# EAGLE board PCB layout - Eagle (EAGLE 7.5.0)
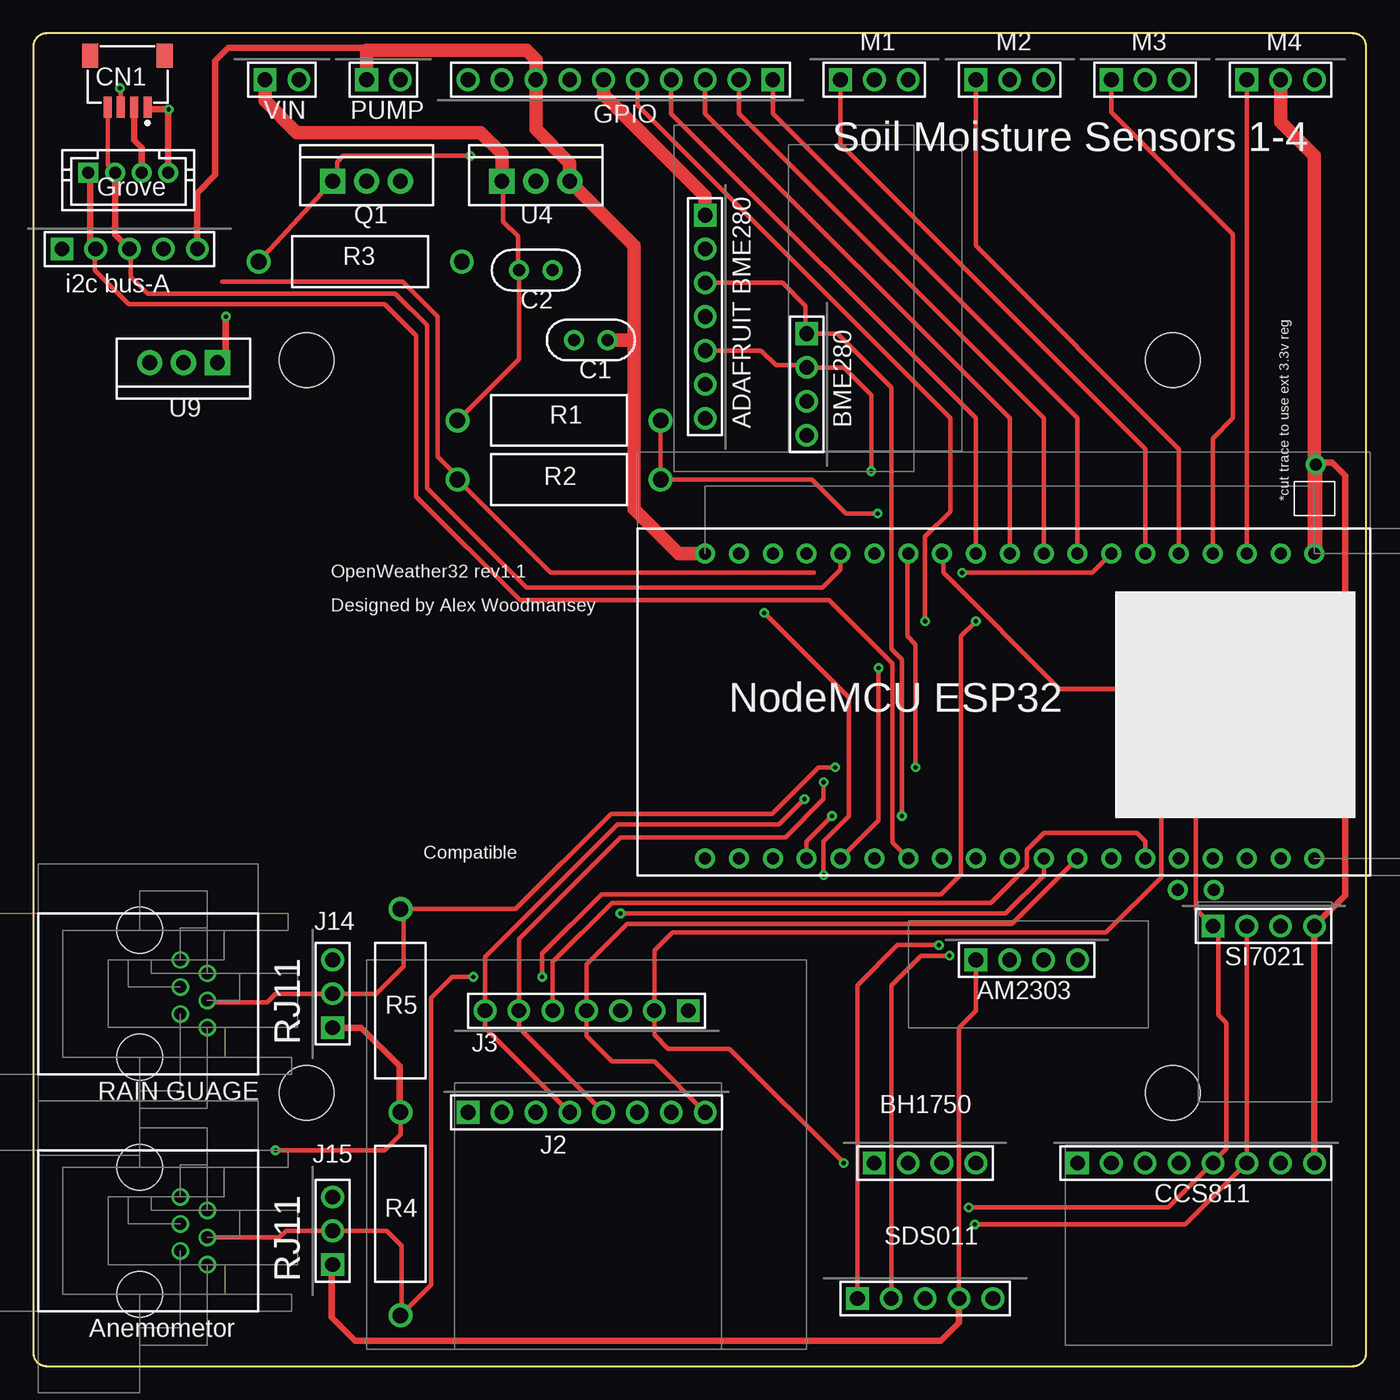
[diagram p0: board, top side]
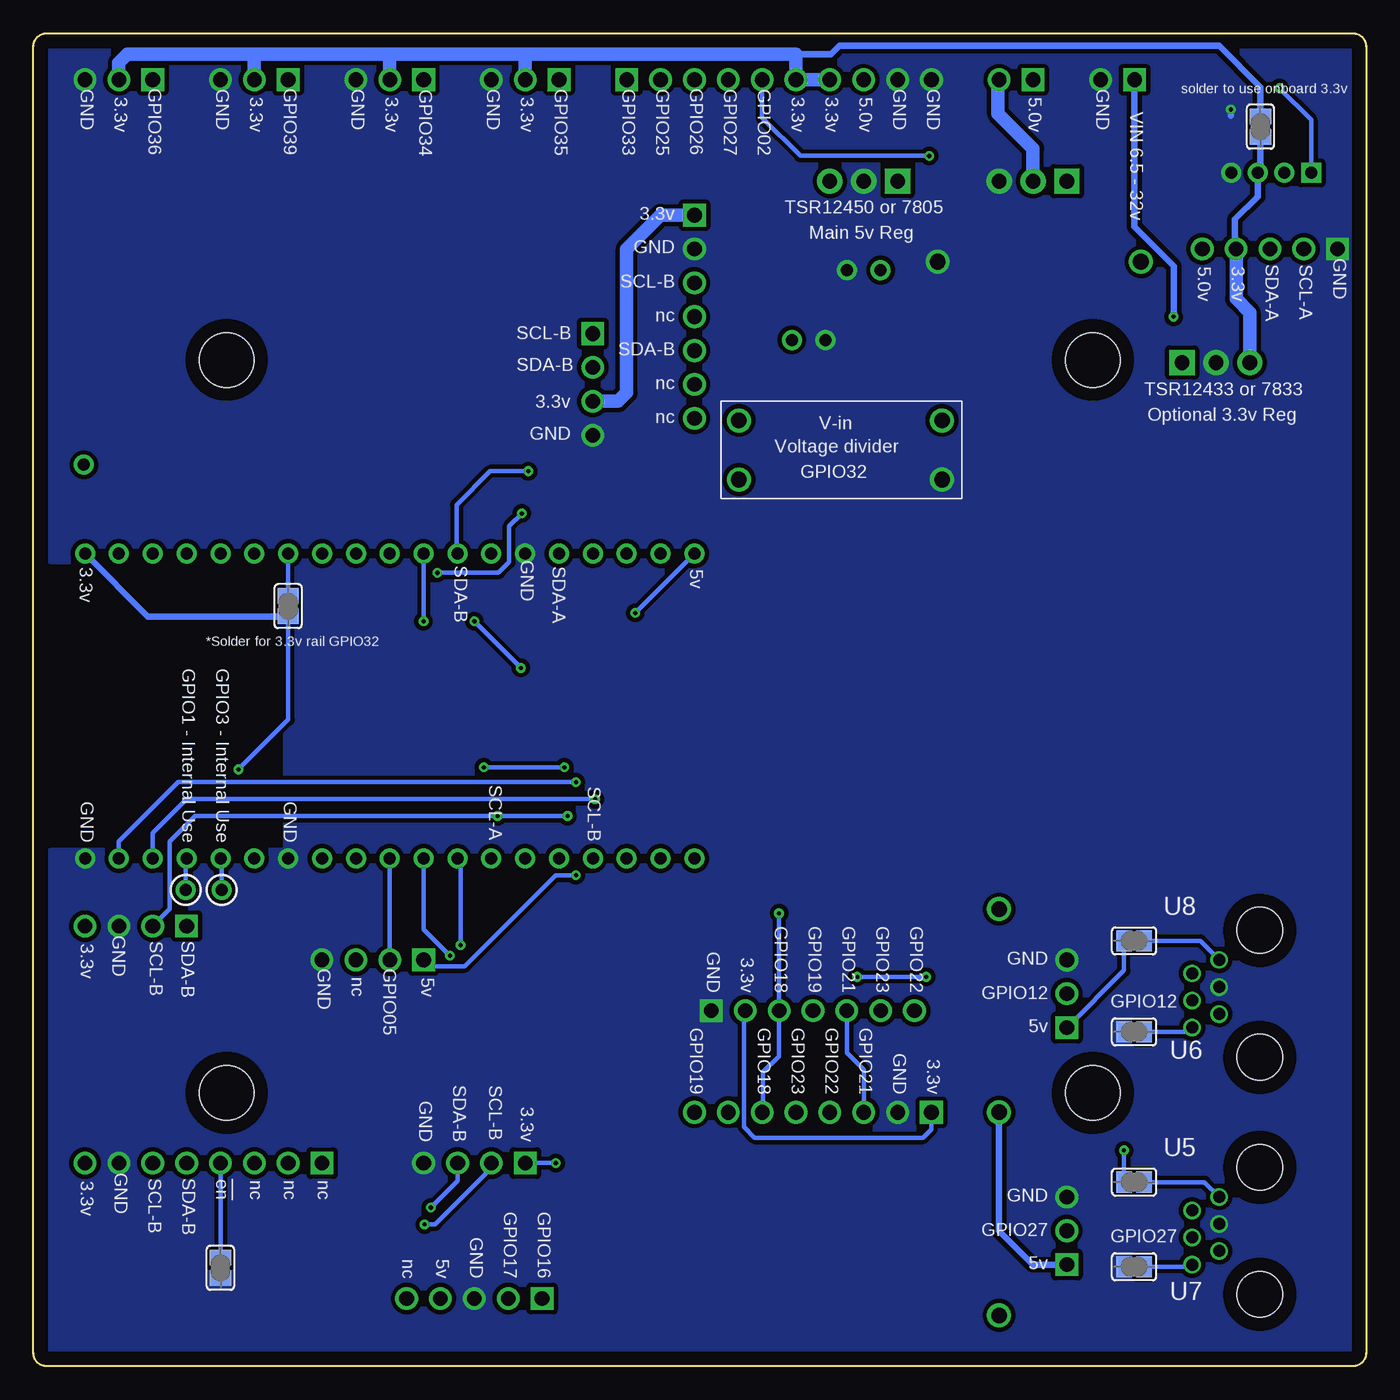
[diagram p1: board, bottom side, seen from below]

Size 100 x 100 mm. Coordinates in mm from the lower left corner, seen from the top.
Outline: 1,0 99,0 arc90 100,1 100,99 arc90 99,100 1,100 arc90 0,99 0,1 arc90 1,0
Copper layers (1*16): Top 0.035mm / dielectric 1.5mm / Bottom 0.035mm
Design rules "default *": minimum track width 10mil, minimum drill 0.61mm, track to track 8mil, track to pad 8mil, pad to pad 8mil, via to via 8mil, smd to smd 8mil, copper to edge 40mil, drill to drill 8mil, minimum pad ring 0mil, minimum via ring 8mil, stop-mask expansion 4mil, vias tented up to drill 35mil, thermal gap 10mil
Net classes: 0 Default: width 0.33 mm, clearance 0.33 mm, clearance 0.33 mm to class 1, clearance 0.33 mm to class 2; 1 GND: width 0.33 mm, clearance 0.33 mm, clearance 0.33 mm to class 0, clearance 0.33 mm to class 2; 2 Power: width 1 mm, clearance 0.33 mm, clearance 0.33 mm to class 0, clearance 0.33 mm to class 1
Holes 4.1 mm at 20.5,75.5 85.5,75.5 85.5,20.5 20.5,20.5

## Footprints (pad centres in the part's own frame; a part is rotated, then mirrored left to right if it is on the bottom)
HDR-1x2T/2.54/5x2 = drill 1.1 pad 1.7 square: 1 -1.27,0 | drill 1.1 pad 1.7: 2 1.27,0
CAP-2.54/6.6x3 = drill 0.9 pad 1.5: 1 -1.27,0; 2 1.27,0
SM4B-SRSS-TB = smd 0.6 x 1.55: 1 -1.5,0.325; 2 -0.5,0.325; 3 0.5,0.325; 4 1.5,0.325 | smd 1.2 x 1.8: 5 2.8,-3.55; 6 -2.8,-3.55
B4B-PH-K-S = drill 0.9 pad 1.5 square: 1 -3,0 | drill 0.9 pad 1.5: 2 -1,0; 3 1,0; 4 3,0
HDR-1x5T/2.54/12x2 = drill 1.1 pad 1.7 square: 1 -5.08,0 | drill 1.1 pad 1.7: 2 -2.54,0; 3 0,0; 4 2.54,0; 5 5.08,0
HDR-1x8T/2.54/20x2 = drill 1.1 pad 1.7 square: 1 -8.89,0 | drill 1.1 pad 1.7: 2 -6.35,0; 3 -3.81,0; 4 -1.27,0; 5 1.27,0; 6 3.81,0; 7 6.35,0; 8 8.89,0
HDR-1x7T/2.54/18x2 = drill 1.1 pad 1.7 square: 1 -7.62,0 | drill 1.1 pad 1.7: 2 -5.08,0; 3 -2.54,0; 4 0,0; 5 2.54,0; 6 5.08,0; 7 7.62,0
HDR-1x4T/2.54/10x2 = drill 1.1 pad 1.7 square: 1 -3.81,0 | drill 1.1 pad 1.7: 2 -1.27,0; 3 1.27,0; 4 3.81,0
HDR-1x7T/2.54/18x2_J11 = drill 1.1 pad 1.7 square: 1 -7.62,0 | drill 1.1 pad 1.7: 2 -5.08,0; 3 -2.54,0; 4 0,0; 5 2.54,0; 6 5.08,0; 7 7.62,0
HDR-1x4T/2.54/10x2_J12 = drill 1.1 pad 1.7 square: 1 -3.81,0 | drill 1.1 pad 1.7: 2 -1.27,0; 3 1.27,0; 4 3.81,0
HDR-1x10T/2.54/25x2 = drill 1.1 pad 1.7 square: 1 -11.43,0 | drill 1.1 pad 1.7: 2 -8.89,0; 3 -6.35,0; 4 -3.81,0; 5 -1.27,0; 6 1.27,0; 7 3.81,0; 8 6.35,0; 9 8.89,0; 10 11.43,0
HDR-1x3T/2.54/7x2 = drill 1.1 pad 1.7 square: 1 -2.54,0 | drill 1.1 pad 1.7: 2 0,0; 3 2.54,0
HDR-1x3T/2.54/7x2_M1 = drill 1.1 pad 1.7 square: 1 -2.54,0 | drill 1.1 pad 1.7: 2 0,0; 3 2.54,0
TO-220 = drill 1.1 pad 1.9 square: 1 -2.54,0 | drill 1.1 pad 1.9: 2 0,0; 3 2.54,0
RES-15.24/10.2x3.8 = drill 1.17 pad 1.8: 1 -7.62,0; 2 7.62,0
RES-15.24/10.2x3.8_R3 = drill 1.168 pad 1.778: 1 -7.62,0; 2 7.62,0
RES-15.24/10.2x3.8_R4 = drill 1.17 pad 1.8: 1 -7.62,0; 2 7.62,0
RJE01-660-01 = drill 0.9 pad 1.3: 1 3.046,1.015; 2 2.03,-1.015; 3 1.016,1.015; 4 0,-1.015; 5 -1.014,1.015; 6 -2.03,-1.015 | hole 3.45: 5.27,-4.064; -4.252,-4.064
TESTPOINT = drill 0.9 pad 1.5: TP 0,0
NodeMCU-32S = drill 0.9 pad 1.5: 1 5.08,24.13; 2 7.62,24.13; 3 10.16,24.13; 4 12.7,24.13; 5 15.24,24.13; 6 17.78,24.13; 7 20.32,24.13; 8 22.86,24.13; 9 25.4,24.13; 10 27.94,24.13; 11 30.48,24.13; 12 33.02,24.13; 13 35.56,24.13; 14 38.1,24.13; 15 40.64,24.13; 16 43.18,24.13; 17 45.72,24.13; 18 48.26,24.13; 19 50.8,24.13; 20 5.08,1.27; 21 7.62,1.27; 22 10.16,1.27; 23 12.7,1.27; 24 15.24,1.27; 25 17.78,1.27; 26 20.32,1.27; 27 22.86,1.27; 28 25.4,1.27; 29 27.94,1.27; 30 30.48,1.27; 31 33.02,1.27; 32 35.56,1.27; 33 38.1,1.27; 34 40.64,1.27; 35 43.18,1.27; 36 45.72,1.27; 37 48.26,1.27; 38 50.8,1.27
SOLDERJUMPER_CLOSEDWIRE = smd 1.168 x 1.6: 1 -0.762,0; 2 0.762,0 | smd 0.635 x 0.203: WIRE 0,0
SOLDERJUMPER_REFLOW = smd 1.168 x 1.6: 1 -0.762,0; 2 0.762,0
SOLDERJUMPER_REFLOW_U5 = smd 1.168 x 1.6: 1 -0.762,0; 2 0.762,0

## Placement (x,y rotation side)
B1  VIN  [HDR-1x2T/2.54/5x2]  18.65,96.52 0 top
C1  10uf  [CAP-2.54/6.6x3]  41.83,76.99 180 top
C2  10uf  [CAP-2.54/6.6x3]  37.7,82.23 0 top
CN1  QWIIC  [SM4B-SRSS-TB]  7.07,94.78 180 top
CN2  Grove  [B4B-PH-K-S]  7.13,89.53 0 top
DS1  PUMP  [HDR-1x2T/2.54/5x2]  26.27,96.52 0 top
J1  SDS011  [HDR-1x5T/2.54/12x2]  66.91,5.08 0 top
J2  AS3935  [HDR-1x8T/2.54/20x2]  41.51,19.05 0 top
J3  SPARKFUN AS3935  [HDR-1x7T/2.54/18x2]  41.51,26.67 180 top
J4  CCS811  [HDR-1x8T/2.54/20x2]  87.23,15.24 0 top
J5  AM2303  [HDR-1x4T/2.54/10x2]  74.53,30.48 0 top
J6  BH1750  [HDR-1x4T/2.54/10x2]  66.9,15.24 0 top
J10  SI7021  [HDR-1x4T/2.54/10x2]  92.31,33.02 0 top
J11  ADAFRUIT BME280  [HDR-1x7T/2.54/18x2_J11]  50.4,78.74 270 top
J12  BME280  [HDR-1x4T/2.54/10x2_J12]  58.02,73.66 270 top
J13  GPIO  [HDR-1x10T/2.54/25x2]  44.05,96.52 180 top
J14  HDR-1X3T/2.54/7X2  [HDR-1x3T/2.54/7x2]  22.46,27.94 90 top
J15  HDR-1X3T/2.54/7X2  [HDR-1x3T/2.54/7x2]  22.46,10.16 90 top
J16  i2c bus-A  [HDR-1x5T/2.54/12x2]  7.22,83.82 0 top
M1  D35  [HDR-1x3T/2.54/7x2_M1]  63.1,96.52 0 top
M2  644456-3  [HDR-1x3T/2.54/7x2_M1]  73.26,96.52 0 top
M3  644456-3  [HDR-1x3T/2.54/7x2_M1]  83.42,96.52 0 top
M4  644456-3  [HDR-1x3T/2.54/7x2_M1]  93.58,96.52 0 top
Q1  MOSFET_ENH_N  [TO-220]  25,88.9 0 top
R1  RES600  [RES-15.24/10.2x3.8]  39.45,70.96 180 top
R2  RES600  [RES-15.24/10.2x3.8]  39.45,66.52 0 top
R3  RES600  [RES-15.24/10.2x3.8_R3]  24.52,82.87 180 top
R4  RES600  [RES-15.24/10.2x3.8_R4]  27.54,11.43 90 top
R5  RES600  [RES-15.24/10.2x3.8_R4]  27.54,26.67 270 top
RJ-1  Anemometor  [RJE01-660-01]  12.04,10.67 270 top
RJ-2  RAIN GUAGE  [RJE01-660-01]  12.04,28.45 270 top
TP1  TESTPOINT  [TESTPOINT]  85.88,35.72 0 bottom
TP2  TESTPOINT  [TESTPOINT]  88.58,35.72 0 bottom
U1  NODEMCU-32S  [NodeMCU-32S]  45.32,36.83 0 top
U2  SOLDERJUMPERCLOSED  [SOLDERJUMPER_CLOSEDWIRE]  85.96,7.38 90 bottom
U3  3.3V ADC  [SOLDERJUMPER_REFLOW]  80.88,57.02 90 bottom
U4  TSR12450  [TO-220]  37.7,88.9 0 top
U5  Pin 6 5v  [SOLDERJUMPER_REFLOW_U5]  17.41,13.81 0 bottom
U6  Pin 1 GND  [SOLDERJUMPER_REFLOW_U5]  17.41,25.08 0 bottom
U7  Pin 1 GND  [SOLDERJUMPER_REFLOW_U5]  17.41,7.46 0 bottom
U8  Pin 6 5v  [SOLDERJUMPER_REFLOW_U5]  17.41,31.91 0 bottom
U9  TSR 1-2433  [TO-220]  11.27,75.3 180 top
U10  SOLDERJUMPERREFLOW  [SOLDERJUMPER_REFLOW]  7.94,93 90 bottom

## Library data of the parts
B1 = common; ATTR_1: Single Cell; DESCRIPTION: Battery; VALUE: Vin
C1 C2 R1-R5 TP1 TP2 U1-U3 U5-U8 U10 = common
CN1 = common; DATASHEET: https://www.jst-mfg.com/product/pdf/eng/eSH.pdf?5ec448f3f0751
CN2 = common; DATASHEET: https://www.jst-mfg.com/product/pdf/eng/ePH.pdf?5ec1314fe8315
DS1 = common; DESCRIPTION: Lamp; VALUE: Pump
J1-J6 J10 J12 J13 M1-M4 = common; DATASHEET: http://datasheets.diptrace.com/con_headers/ENG_CD_644456_D2.pdf; MANUFACTURER: TE Connectivity
J11 = common; DATASHEET: http://datasheets.diptrace.com/con_headers/ENG_CD_644456_D2.pdf; MANUFACTURER: TE Connectivity; VALUE: Adafruit BME280
J14-J16 = common; DATASHEET: http://datasheets.diptrace.com/con_headers/ENG_CD_644456_D2.pdf
Q1 = common; ATTR_1: Enhancement Mode; ATTR_2: N-Channel; ATTR_3: Single-Gate; DESCRIPTION: MOSFET
RJ-1 = common; DATASHEET: http://www.mouser.com/ds/2/18/amphenol_RJE016X001-522744.pdf; MANUFACTURER: Amphenol
RJ-2 = common; DATASHEET: http://www.mouser.com/ds/2/18/amphenol_RJE016X001-522744.pdf; MANUFACTURER: Amphenol; VALUE: Rain Guage
U4 U9 = common; MANUFACTURER: Atmel

## Nets
3.3v [Power]: J2.1 J3.2 J4.8 J6.1 J10.4 J11.1 J12.3 J13.6 J13.7 M1.2 M2.2 M3.2 M4.2 U1.19 U3.1 U10.2
Net_0 [Power]: C1.1 DS1.1 J1.4 J5.1 J13.8 J14.1 J15.1 J16.5 R4.2 R5.2 U1.1 U4.3 U5.1 U8.1
Net_1: J2.8 J3.4 U1.31
Net_2 [GND]: B1.2 C1.2 C2.2 CN1.1 CN2.4 J1.3 J2.2 J3.1 J4.7 J5.4 J6.4 J10.3 J11.2 J12.4 J13.9 J13.10 J14.3 J15.3 J16.1 M1.3 M2.3 M3.3 M4.3 Q1.3 R2.1 R3.1 RJ-1.4 RJ-2.4 U1.6 U1.32 U1.38 U2.1 U4.2 U6.1 U7.1 U9.2
Net_3: J14.2 R5.1 RJ-2.3 U1.7
Net_4: RJ-1.1 U7.2
Net_5: CN1.3 CN2.1 J16.2 U1.26
Net_6: CN1.4 CN2.2 J16.3 U1.5
Net_7: J4.4 U2.2
Net_8: J1.1 U1.27
Net_9: J1.2 U1.28
Net_10: DS1.2 Q1.2
Net_11: M3.1 U1.16
Net_12: M2.1 U1.15
Net_13: M1.1 U1.14
Net_14: M4.1 U1.17
Net_16: R1.1 R2.2 U1.13 U3.2
Net_17: J5.2 U1.29
Net_18: B1.1 C2.1 R1.2 U4.1 U9.1
Net_19: J2.3 J3.5 U1.33
Net_20: J2.5 J3.6 U1.37
Net_21: J2.4 J3.7 U1.36
Net_22: J2.6 J3.3 U1.30
Net_25: J13.1 U1.12
Net_26: J13.2 U1.11
Net_27: J13.3 U1.10
Net_28: J13.4 J15.2 R4.1 RJ-1.3 U1.9
Net_29: J13.5 Q1.1 R3.2 U1.24
Net_30: RJ-2.1 U6.2
Net_31: RJ-1.6 U5.2
Net_32: RJ-2.6 U8.2
Net_33 [Power]: CN1.2 CN2.3 J16.4 U9.3 U10.1
Net_34: TP2.TP U1.35
Net_36: TP1.TP U1.34
SCL_i2c_bus-B: J4.6 J6.2 J10.2 J11.3 J12.1 U1.23
SDA_i2c_bus-B: J4.5 J6.3 J10.1 J11.5 J12.2 U1.8

## Tracks (layer width: path | path; a pad name or v marks a point on that pad's centre or on a via)
3.3v  (via drill 0.32 pad 0.7, 0.9 pad 1.5)
  Top 0.33: v84.61,44.77 84.61,36.67 80.49,32.54 47.94,32.54 46.59,31.19 J3.2 46.59,24.85 47.62,23.81 52.23,23.81 v60.8,15.24
  Top 0.5: J4.8 J10.4 98.42,35.33 98.42,66.83 97.47,67.79 96.2,67.79 v96.2,67.63
  Top 1: M4.2 93.58,93.34 96.12,90.81 U1.19 96.2,61.04 v96.2,67.63 | J11.1 50.4,87.79 42.78,95.41 J13.6
  Bottom 0.33: J3.2 46.67,26.67 46.67,17.94 45.88,17.14 33.26,17.14 32.62,17.78 J2.1 | v84.61,44.77 80.88,48.5 U3.1 | J6.1 v60.8,15.24
  Bottom 0.5: U3.1 91.42,56.26 U1.19 | 42.78,98.42 40.15,98.42 39.52,99.06 11.03,99.06 7.94,95.97 U10.2
  Bottom 1: M1.2 63.1,98.42 | 63.1,98.42 73.26,98.42 | 73.26,98.42 83.42,98.42 | 83.42,98.42 92.94,98.42 93.58,97.79 M4.2 | M2.2 73.26,98.42 | M3.2 83.42,98.42 | J13.7 J13.6 42.78,98.42 63.1,98.42 | J12.3 56.12,72.39 55.48,73.03 55.48,83.82 52.94,86.36 J11.1
Net_0  (via drill 0.32 pad 0.7)
  Top 0.33: J1.4 69.45,25.4 70.72,26.67 J5.1 | v59.29,36.83 59.29,39.37 61.2,41.27 61.2,50.16 v54.84,56.52 | R5.2 27.54,17.38 26.35,16.19 v18.17,16.19 | C1.1 44.77,76.99 45.4,76.36 45.4,77.26 45.09,77.26
  Top 0.5: R5.2 27.46,19.05 27.46,22.54 24.61,25.4 J14.1 | R5.2 | J15.1 22.38,7.62 22.38,3.65 24.13,1.91 68.1,1.91 69.45,3.25 J1.4 | J16.5 12.3,88.02 13.65,89.38 13.65,97.95 14.61,98.9 25.56,98.9 25.56,98.74
  Top 1: U1.1 48.42,60.96 45.09,64.29 45.09,76.99 | 45.09,76.99 45.09,77.26 45.09,84.06 U4.3 40.24,90.25 37.7,92.79 J13.8 37.7,98.03 36.99,98.74 25.56,98.74 25,98.74 DS1.1 | C1.1 45.09,76.99
  Bottom 0.33: J5.1 70.72,30 67.63,30 60.8,36.83 v59.29,36.83 | v54.84,56.52 U1.1 | v18.17,16.19 U5.1 | J14.1 18.17,29.69 U8.1
  Bottom 0.5: J15.1 25,7.62 27.54,10.16 R5.2
Net_1
  Top 0.33: U1.31 73.42,33.18 44.53,33.18 41.51,30.16 J3.4 41.51,24.77 43.41,22.86 46.59,22.86 J2.8
Net_2  (via drill 0.32 pad 0.7)
  Top 0.33: 58.58,59.53 38.81,59.53 R2.1 32.14,66.83 31.75,66.83 30.32,68.26 30.32,78.74 27.7,81.36 14.17,81.36
  Top 0.5: CN1.1 8.57,94.3 v10.16,94.3 10.13,94.27 CN2.4
  Bottom 0.5: v10.16,94.3 10.16,93.82
  pour Bottom (isolate 0.3): 98.78,1.12 1.02,1.12 1.02,98.88 98.78,98.88 98.64,60.48 81.28,60.48 81.16,60.46 81.06,60.39 80.99,60.29 80.96,60.17 80.96,38.89 80.99,38.77 81.06,38.67 81.16,38.6 81.28,38.58 98.64,38.58
Net_3  (via drill 0.32 pad 0.7)
  Top 0.33: RJ-2.3 13.06,27.3 17.54,27.3 18.17,27.94 J14.2 25.72,27.94 27.78,30 27.78,34.29 R5.1 36.2,34.29 43.34,41.43 55.4,41.43 58.9,44.93 v60.17,44.93 | U1.7 65.56,61.04 65.56,54.77 66.2,54.13 v66.2,44.93
  Bottom 0.33: v66.2,44.93 v60.17,44.93
Net_4
  Bottom 0.33: RJ-1.1 13.22,7.46 U7.2
Net_5  (via drill 0.32 pad 0.7)
  Top 0.33: U1.26 64.45,39.29 64.45,52.7 59.69,57.47 36.51,57.47 28.73,65.25 28.73,77.31 26.35,79.69 7.14,79.69 4.6,82.23 4.6,83.74 J16.2 | CN1.3 6.57,95.82 v6.51,95.89
  Top 0.5: CN2.1 4.29,89.53 4.29,84.21 J16.2
  Bottom 0.33: v6.51,95.89 4.13,93.5 CN2.1
Net_6
  Top 0.33: J16.3 7.3,83.74 7.3,81.76 8.57,80.49 27.15,80.49 29.53,78.11 29.53,65.88 36.99,58.42 59.21,58.42 60.56,59.77 U1.5 | CN2.2 5.57,90.09 CN1.4
  Top 0.5: CN2.2 6.13,84.91 J16.3
Net_7
  Bottom 0.33: J4.4 U2.2
Net_8  (via drill 0.32 pad 0.7)
  Top 0.33: v67.94,31.59 64.85,31.59 61.83,28.57 J1.1
  Bottom 0.33: U1.27 67.94,38.1 v67.94,31.59
Net_9  (via drill 0.32 pad 0.7)
  Top 0.33: v68.74,30.8 66.59,30.8 64.37,28.57 J1.2
  Bottom 0.33: U1.28 70.72,32.78 v68.74,30.8
Net_10
  Bottom 1: Q1.2 25,91.36 27.62,93.98 27.62,96.6 DS1.2
Net_11
  Top 0.33: M3.1 80.88,94.06 90.01,84.93 90.01,71.12 88.5,69.61 U1.16
Net_12
  Top 0.33: M2.1 70.72,84.06 85.96,68.82 U1.15
Net_13
  Top 0.33: M1.1 60.56,91.68 83.42,68.82 U1.14
Net_14
  Top 0.33: M4.1 U1.17
Net_16  (via drill 0.32 pad 0.7)
  Top 0.33: R1.1 R2.2 58.42,66.52 60.96,63.98 v63.34,63.98 | U1.13 79.45,59.53 v69.69,59.53 | v63.34,63.98
  Bottom 0.33: U3.2 U1.13 | v69.69,59.53 65.09,59.53 64.29,60.33 64.29,63.02 v63.34,63.98 | 47.31,66.67 47.31,66.52 R2.2
Net_17
  Bottom 0.33: J5.2 U1.29
Net_18  (via drill 0.32 pad 0.7)
  Top 0.33: U4.1 35.24,88.9 35.24,85.88 36.35,84.77 36.35,82.23 C2.1 36.43,75.56 R1.2
  Top 0.5: U9.1 14.45,75.3 v14.45,78.74
  Top 1: B1.1 17.38,94.93 19.76,92.55 33.57,92.55 35.16,90.96 U4.1
  Bottom 0.5: v14.45,78.74 14.45,82.55 17.38,85.48 B1.1
Net_19
  Top 0.33: U1.33 83.42,39.37 82.78,40.01 75.8,40.01 74.53,38.73 74.53,37.47 71.83,34.77 43.41,34.77 38.97,30.32 J3.5
  Bottom 0.33: J3.5 38.97,23.5 37.7,22.23 J2.3
Net_20  (via drill 0.32 pad 0.7)
  Top 0.33: v59.29,43.81 59.29,42.55 56.43,39.69 44.05,39.69 36.43,32.07 J3.6 36.43,25.4 J2.5
  Bottom 0.33: U1.37 93.58,39.37 89.14,43.81 v59.29,43.81
Net_21  (via drill 0.32 pad 0.7)
  Top 0.33: v57.86,42.55 55.96,40.64 43.81,40.64 33.89,30.71 J3.7 33.89,25.4 J2.4
  Bottom 0.33: U1.36 91.04,40.01 88.5,42.55 v57.86,42.55
Net_22  (via drill 0.32 pad 0.7)
  Top 0.33: U1.30 75.8,36.83 72.94,33.97 v44.05,33.97
  Bottom 0.33: v44.05,33.97 J3.3 44.05,23.26 45.24,22.07 45.24,19.05 J2.6
Net_25
  Top 0.33: J13.1 55.48,93.98 78.34,71.12 U1.12
Net_26
  Top 0.33: J13.2 52.94,93.98 75.8,71.12 U1.11
Net_27
  Top 0.33: J13.3 50.4,93.98 73.26,71.12 U1.10
Net_28  (via drill 0.32 pad 0.7)
  Top 0.33: J13.4 47.86,93.98 70.72,71.12 U1.9 | v70.72,55.88 69.61,54.77 69.61,36.91 68.1,35.4 42.62,35.4 38.18,30.96 v38.18,29.21 38.34,29.21 | RJ-1.3 18.46,9.65 18.97,10.16 J15.2 26.51,10.16 27.62,9.05 27.62,3.81 R4.1 29.84,6.12 29.84,27.62 31.43,29.21 v33.02,29.21
  Bottom 0.33: U1.9 v70.72,55.88 | v33.02,29.21 v38.18,29.21
Net_29  (via drill 0.32 pad 0.7)
  Top 0.33: v32.78,90.81 23.25,90.81 22.78,90.33 22.78,89.22 Q1.1 | J13.5 45.32,94.61 68.81,71.12 68.81,64.14 66.91,62.23 v66.91,55.88 | v63.42,52.39 63.42,40.96 U1.24 | R3.2 Q1.1 | Q1.1
  Bottom 0.33: J13.5 45.32,93.66 42.46,90.81 v32.78,90.81 | v66.91,55.88 v63.42,52.39
Net_30
  Bottom 0.33: RJ-2.1 13.38,25.08 U6.2
Net_31
  Bottom 0.33: RJ-1.6 12.14,13.81 U5.2
Net_32
  Bottom 0.33: RJ-2.6 12.46,31.91 U8.2
Net_33
  Top 0.5: CN1.2 7.57,91.96 8.13,91.41 CN2.3
  Bottom 0.5: J16.4 9.84,83.9 9.84,86.04 8.13,87.76 CN2.3 7.94,89.72 U10.1
  Bottom 1: J16.4 9.76,80.09 8.73,79.06 U9.3
Net_34
  Bottom 0.33: U1.35 88.58,38.02 TP2.TP
Net_36
  Bottom 0.33: U1.34 85.88,38.02 TP1.TP
SCL_i2c_bus-B  (via drill 0.32 pad 0.7)
  Top 0.33: v59.92,41.27 58.02,39.37 U1.23 | J10.2 J4.6 86.44,10.64 v70.64,10.64 | J11.3 56.2,81.28 57.94,79.53 57.94,77.47 J12.1 60.33,77.47 64.37,73.42 64.37,53.82 65.16,53.02 v65.16,41.27
  Bottom 0.33: J10.2 89.77,34.29 89.77,39.37 87.86,41.27 v65.16,41.27 v59.92,41.27 | v70.64,10.64 69.85,10.64 65.25,15.24 J6.2
SDA_i2c_bus-B  (via drill 0.32 pad 0.7)
  Top 0.33: U1.8 68.26,60.96 68.26,59.53 76.99,50.8 81.6,50.8 87.23,45.17 87.23,34.29 J10.1 88.9,33.02 88.9,26.35 89.5,25.75 89.5,16.32 88.42,15.24 J4.5 85.17,11.91 v70.17,11.91 | J11.5 54.61,76.2 55.72,75.09 57.86,75.09 J12.2 60.8,74.93 62.87,72.87 v62.87,67.15
  Bottom 0.33: J6.3 68.17,13.9 v70.17,11.91 | v62.87,67.15 65.72,67.15 68.26,64.61 68.26,61.04 U1.8

## Text on the board
tPlace: Soil Moisture Sensors 1-4 | *cut trace to use ext 3.3v reg | OpenWeather32 rev1.1 | Designed by Alex Woodmansey | NodeMCU ESP32 | Compatible
bPlace: solder to use onboard 3.3v | GND | 5.0v | GND | GND | 5.0v | 3.3v | 3.3v | 3.3v | GND | 3.3v | GND | 3.3v | GND | 3.3v | GND | GPIO02 | GPIO27 | GPIO26 | GPIO25 | GPIO33 | GPIO35 | GPIO34 | GPIO39 | GPIO36 | TSR12450 or 7805 | 3.3v | VIN 6.5 - 32v | Main 5v Reg | GND | SCL-B | GND | 3.3v | 5.0v | SCL-A | nc | SDA-A | SCL-B | SDA-B | SDA-B | TSR12433 or 7833 | nc | 3.3v | Optional 3.3v Reg | nc | V-in | Voltage divider | GND | GPIO32 | 5v | GND | 3.3v | SDA-A | SDA-B | *Solder for 3.3v rail GPIO32 | SCL-B | SCL-A | GND | GPIO3 - Internal Use | GPIO1 - Internal Use | GND | GND | GPIO12 | GND | 3.3v | GPIO12 | GPIO22 | GPIO23 | GPIO21 | GPIO19 | GPIO18 | 3.3v | GND | 5v | nc | SDA-B | SCL-B | GND | 5v | GPIO05 | 3.3v | GND | GPIO21 | GPIO22 | GPIO23 | GPIO18 | GPIO19 | 3.3v | SCL-B | SDA-B | GND | GND | nc | nc | nc | !en | GPIO27 | GND | 3.3v | GPIO27 | SDA-B | SCL-B | 5v | GPIO16 | GPIO17 | GND | 5v | nc